# EAGLE board board (EAGLE 9.6.2)
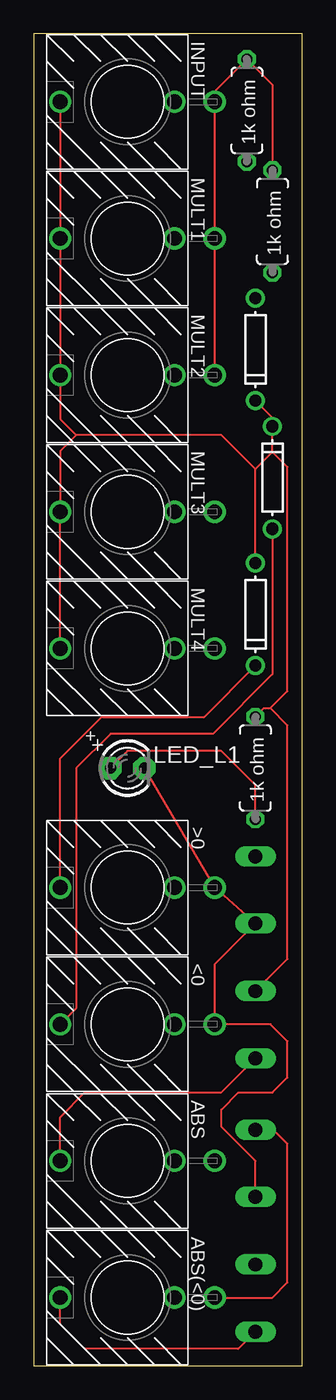
[diagram p0: board, top side]
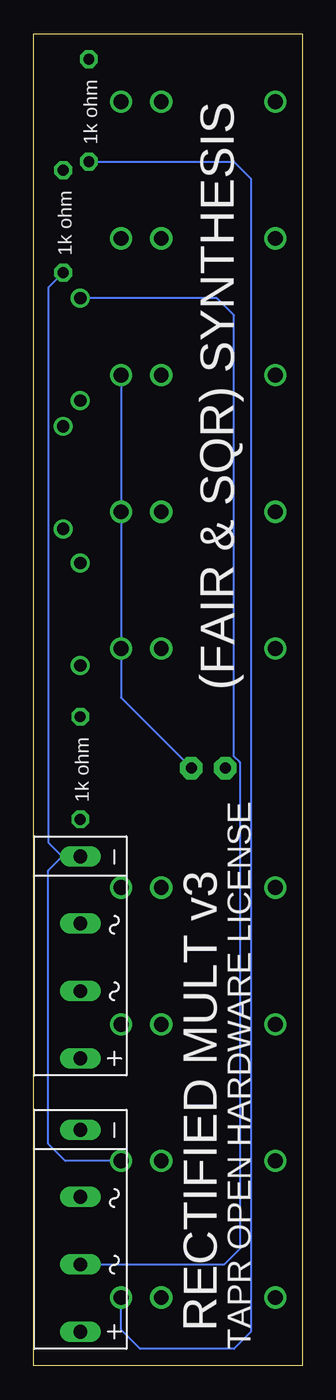
[diagram p1: board, bottom side, seen from below]

Size 19.99 x 99.05 mm. Coordinates in mm from the lower left corner, seen from the top.
Outline: 0,0 19.99,0 19.99,99.05 0,99.05 0,0
Copper layers (1*16): Top 0.035mm / dielectric 1.5mm / Bottom 0.035mm
Design rules "default": minimum track width 6mil, minimum drill 0.35mm, track to track 6mil, track to pad 6mil, pad to pad 6mil, via to via 6mil, smd to smd 6mil, copper to edge 40mil, drill to drill 6mil, minimum pad ring 10mil, minimum via ring 8mil, stop-mask expansion 4mil, vias tented up to drill 0mil, thermal gap 10mil

## Footprints (pad centres in the part's own frame; a part is rotated, then mirrored left to right if it is on the bottom)
WQP-PJ366ST_JACK = drill 1.1: P$1_TIP 0,5; P$2_SWITCH 0,-3.5; P$3_SLEEVE 0,-6.5
2KBB-R = drill 1.016 long: + -7.62,0; - 7.391,0; AC1 -2.616,0; AC2 2.413,0
DO-1N4148 = drill 0.9: A -3.81,0; C 3.81,0
LED3MM = drill 0.813 pad 1.676 octagon: A -1.27,0; K 1.27,0
7MM_RESISTOR = drill 0.813 octagon: 1 -3.81,0; 2 3.81,0

## Placement (x,y rotation side)
<0  THONKI-STEREO  [WQP-PJ366ST_JACK]  6.99,25.4 90 top
>0  THONKI-STEREO  [WQP-PJ366ST_JACK]  6.99,35.56 90 top
ABS  THONKI-STEREO  [WQP-PJ366ST_JACK]  6.99,15.24 90 top
ABS(<0)  THONKI-STEREO  [WQP-PJ366ST_JACK]  6.99,5.08 90 top
B1  [2KBB-R]  16.51,30.48 90 bottom
B2  [2KBB-R]  16.51,10.16 90 bottom
D1  [DO-1N4148]  16.51,55.88 270 top
D2  [DO-1N4148]  17.78,66.04 90 top
D3  [DO-1N4148]  16.51,75.56 270 top
INPUT  [WQP-PJ366ST_JACK]  6.99,93.98 90 top
LED_L1  [LED3MM]  6.99,44.45 0 top
MULT1  [WQP-PJ366ST_JACK]  6.99,83.82 90 top
MULT2  [WQP-PJ366ST_JACK]  6.99,73.66 90 top
MULT3  [WQP-PJ366ST_JACK]  6.99,63.5 90 top
MULT4  [WQP-PJ366ST_JACK]  6.99,53.34 90 top
R1  [7MM_RESISTOR]  17.78,85.09 270 top
R2  [7MM_RESISTOR]  15.88,93.34 270 top
R3  [7MM_RESISTOR]  16.51,44.45 90 top

## Library data of the parts
<0 >0 ABS ABS(<0) INPUT MULT1-MULT4 R1-R3 = MusicThingModular
B1 B2 = rectifier
D1-D3 LED_L1 = adafruit

## Nets
N$1: ABS(<0).P$1_TIP B2.+
N$2: >0.P$1_TIP D1.C
N$3: B2.AC1 D3.A
N$4: LED_L1.A R3.1
N$5: <0.P$1_TIP D2.A
N$6: B1.AC1 D1.A D2.C D3.C INPUT.P$1_TIP MULT1.P$1_TIP MULT2.P$1_TIP MULT3.P$1_TIP MULT4.P$1_TIP R3.2
N$7: <0.P$3_SLEEVE >0.P$3_SLEEVE B1.AC2 B2.AC2 INPUT.P$3_SLEEVE LED_L1.K MULT1.P$3_SLEEVE MULT2.P$3_SLEEVE MULT3.P$3_SLEEVE MULT4.P$3_SLEEVE R1.1 R2.1
N$8: ABS.P$3_SLEEVE B1.- R1.2
N$9: ABS.P$1_TIP B1.+
N$10: ABS(<0).P$3_SLEEVE B2.- R2.2

## Tracks (layer width: path | path; a pad name or v marks a point on that pad's centre or on a via)
N$1
  Top 0.152: B2.+ 15.24,1.27 3.81,1.27 1.99,3.1 ABS(<0).P$1_TIP
N$2
  Top 0.152: >0.P$1_TIP 1.99,45.16 5.08,48.26 12.7,48.26 D1.C
N$3
  Bottom 0.152: B2.AC1 5.79,7.54 4.65,8.69 4.65,44.89 5.08,45.32 5.08,78.11 6.35,79.38 D3.A
N$4
  Top 0.152: LED_L1.A 6.99,45.72 13.97,45.72 16.51,43.18 R3.1
N$5
  Top 0.152: D2.A 17.78,51.44 13.34,46.99 5.71,46.99 3.17,44.45 3.17,26.59 <0.P$1_TIP
N$6
  Top 0.152: INPUT.P$1_TIP MULT1.P$1_TIP MULT2.P$1_TIP 1.99,70.41 3.17,69.22 | MULT4.P$1_TIP MULT3.P$1_TIP 1.99,68.03 3.17,69.22 | B1.AC1 18.9,30.25 18.9,47.62 17.63,48.9 | 17.63,48.9 18.9,50.16 18.9,66.83 17.78,67.94 | 17.78,67.94 D2.C 17.78,70.48 D3.C | 17.78,67.94 16.51,66.67 | 16.51,66.67 13.97,69.22 3.17,69.22 | D1.A 16.51,66.67 | R3.2 17.14,48.9 17.63,48.9
N$7
  Top 0.152: LED_L1.K >0.P$3_SLEEVE B1.AC2 13.48,29.87 <0.P$3_SLEEVE 17.63,25.4 18.9,24.13 18.9,21.44 17.78,20.32 15.24,20.32 13.97,19.05 13.97,17.78 16.51,15.24 B2.AC2 | MULT2.P$3_SLEEVE MULT1.P$3_SLEEVE INPUT.P$3_SLEEVE 13.48,94.77 R2.1 17.78,95.25 R1.1
  Bottom 0.152: MULT2.P$3_SLEEVE MULT3.P$3_SLEEVE MULT4.P$3_SLEEVE 13.48,49.68 LED_L1.K
N$8
  Bottom 0.152: ABS.P$3_SLEEVE 17.63,15.24 18.9,16.51 18.9,36.83 17.86,37.87 | 17.86,37.87 B1.- | R1.2 18.9,80.16 18.9,38.91 17.86,37.87
N$9
  Top 0.152: ABS.P$1_TIP 1.99,18.5 3.81,20.32 13.97,20.32 B1.+
N$10
  Top 0.152: ABS(<0).P$3_SLEEVE 17.78,5.08 18.9,6.2 18.9,16.51 17.86,17.55 B2.-
  Bottom 0.152: R2.2 5.08,89.53 3.81,88.27 3.81,2.54 5.08,1.27 12.06,1.27 13.48,2.69 ABS(<0).P$3_SLEEVE

## Text on the board
tPlace: 1k ohm | 1k ohm | + | 1k ohm
bPlace: (FAIR & SQR) SYNTHESIS | 1k ohm | 1k ohm | 1k ohm | RECTIFIED MULT v3 | TAPR OPEN HARDWARE LICENSE